# EAGLE board PiZeroAudioI2S (EAGLE 9.4.1)
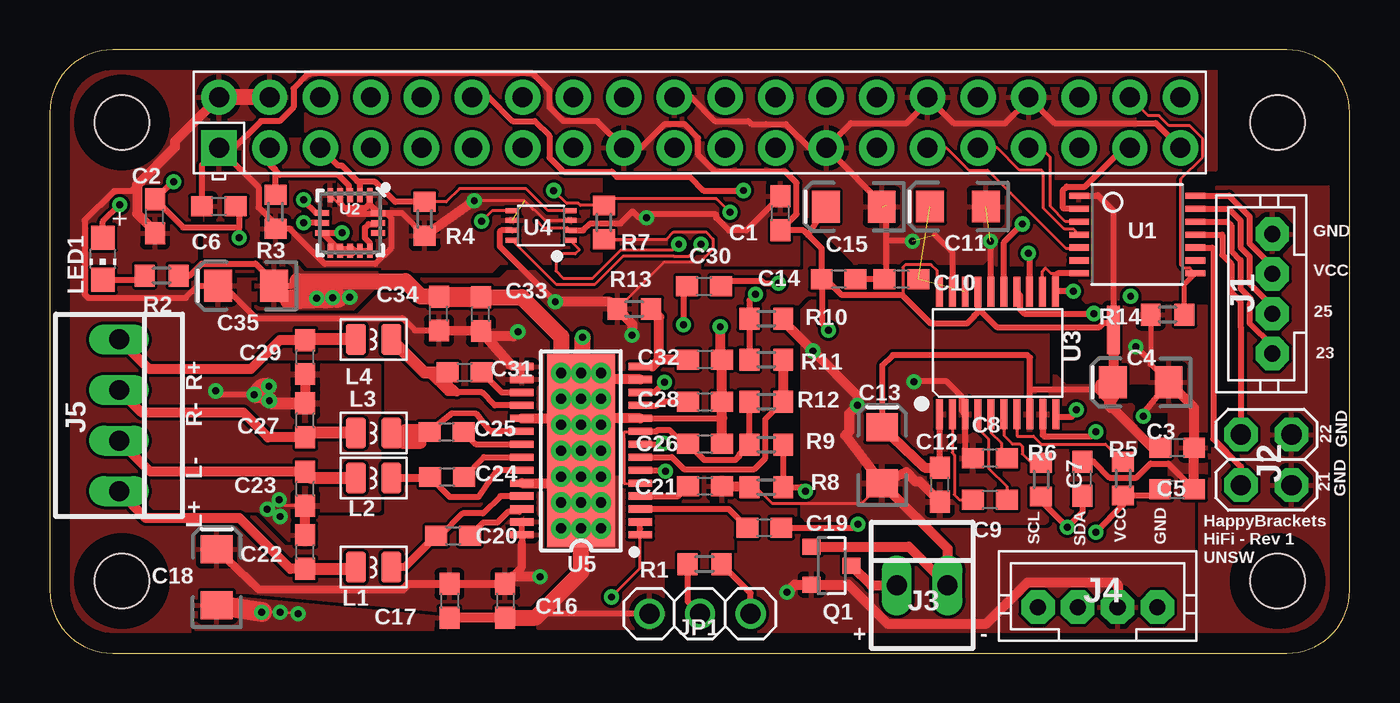
[diagram p0: board, top side]
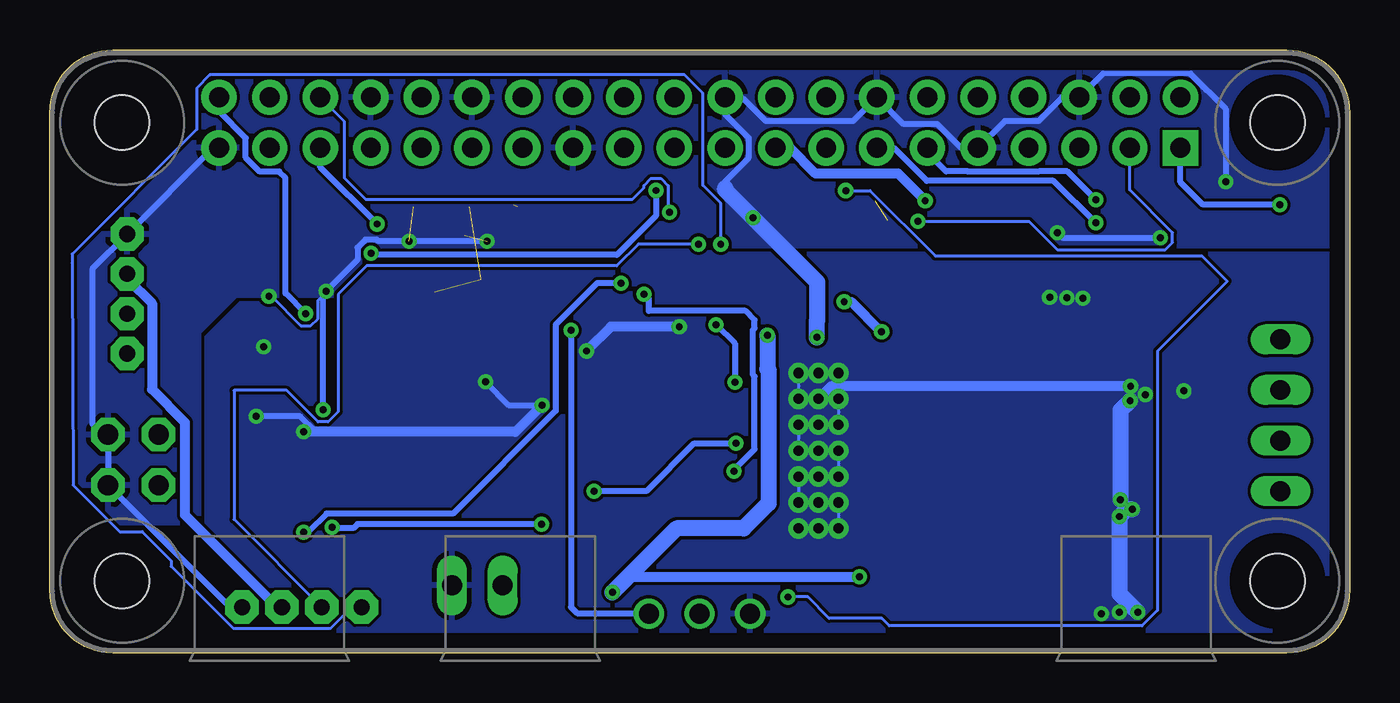
[diagram p1: board, bottom side, seen from below]

Size 65.25 x 30.28 mm. Coordinates in mm from the lower left corner, seen from the top.
Outline: 0,3.86 0,3.15 arc90 3.15,0 61.39,0 62.1,0 arc90 65.25,3.15 65.25,27.13 arc90 62.1,30.28 3.15,30.28 arc90 0,27.13 0,26.42 0,3.86
Copper layers (1*16): Top 0.035mm / dielectric 1.5mm / Bottom 0.035mm
Design rules "default": minimum track width 6mil, minimum drill 0.35mm, track to track 6mil, track to pad 6mil, pad to pad 6mil, via to via 6mil, smd to smd 6mil, copper to edge 40mil, drill to drill 6mil, minimum pad ring 10mil, minimum via ring 8mil, stop-mask expansion 4mil, vias tented up to drill 0mil, thermal gap 10mil
Net classes: 0 default: width 0.152 mm, clearance 0.152 mm; 2 PWM-LEFT: width 0.305 mm, drill 0.508 mm, clearance 0.508 mm; 3 PWM-RIGHT: width 0.305 mm, drill 0.508 mm, clearance 0.508 mm; 4 AUDIO-L: width 0.305 mm, drill 0.508 mm, clearance 0.508 mm; 5 AUDIO-R: width 0.305 mm, drill 0.508 mm, clearance 0.508 mm; 6 +5V: width 0.508 mm, drill 0.508 mm, clearance 0.254 mm

## Footprints (pad centres in the part's own frame; a part is rotated, then mirrored left to right if it is on the bottom)
C0603 = smd 1.1 x 1: 1 -0.85,0; 2 0.85,0
EIA3216 = smd 1.4 x 1.6: + 1.4,0; - -1.4,0
RASPBERRYPI_BASTELSTUBE_V13_RASPI_BOARD_B+_FULL = drill 1 pad 1.778 square: 1 8.37,25.23 | drill 1 pad 1.778: 2 8.37,27.77; 3 10.91,25.23; 4 10.91,27.77; 5 13.45,25.23; 6 13.45,27.77; 7 15.99,25.23; 8 15.99,27.77; 9 18.53,25.23; 10 18.53,27.77; 11 21.07,25.23; 12 21.07,27.77; 13 23.61,25.23; 14 23.61,27.77; 15 26.15,25.23; 16 26.15,27.77; 17 28.69,25.23; 18 28.69,27.77; 19 31.23,25.23; 20 31.23,27.77; 21 33.77,25.23; 22 33.77,27.77; 23 36.31,25.23; 24 36.31,27.77; 25 38.85,25.23; 26 38.85,27.77; 27 41.39,25.23; 28 41.39,27.77; 29 43.93,25.23; 30 43.93,27.77; 31 46.47,25.23; 32 46.47,27.77; 33 49.01,25.23; 34 49.01,27.77; 35 51.55,25.23; 36 51.55,27.77; 37 54.09,25.23; 38 54.09,27.77; 39 56.63,25.23; 40 56.63,27.77 | hole 2.75: 3.5,3.5; 3.5,26.5; 61.5,3.5; 61.5,26.5
JST-PH4 = drill 0.813 pad 1.676 octagon: 1 -3,0; 2 -1,0; 3 1,0; 4 3,0
2X2 = drill 1.016 pad 1.676 octagon: 1 -3.81,-1.27; 2 -3.81,1.27; 3 -1.27,-1.27; 4 -1.27,1.27
22-23-2021 = drill 1 long: 1 -1.27,0; 2 1.27,0
22-23-2041 = drill 1 long: 1 -3.81,0; 2 -1.27,0; 3 1.27,0; 4 3.81,0
1X03 = drill 1.016: 1 -2.54,0; 2 0,0; 3 2.54,0
L0806 = smd 1.016 x 1.524: 1 -0.889,0; 2 0.889,0
CHIP-LED0805 = smd 1.2 x 1.2: A 0,-1.05; C 0,1.05
SOT23 = smd 0.8 x 0.9: D 0,1; G -0.95,-1; S 0.95,-1
R0603 = smd 1 x 1.1: 1 -0.85,0; 2 0.85,0
SHORT = smd 1.27 x 0.635: AN -0.635,0; DIG 0.508,0
TSSOP14 = smd 0.305 x 0.991: 1 -1.95,-2.918; 2 -1.3,-2.918; 3 -0.65,-2.918; 4 0,-2.918; 5 0.65,-2.918; 6 1.3,-2.918; 7 1.95,-2.918; 8 1.95,2.918; 9 1.3,2.918; 10 0.65,2.918; 11 0,2.918; 12 -0.65,2.918; 13 -1.3,2.918; 14 -1.95,2.918
LGA-16-3X3 = smd 0.7 x 0.28: 1 -1.4,1; 2 -1.4,0.5; 3 -1.4,0; 4 -1.4,-0.5; 5 -1.4,-1; 9 1.4,-1; 10 1.4,-0.5; 11 1.4,0; 12 1.4,0.5; 13 1.4,1 | smd 0.28 x 0.7: 6 -0.5,-1.4; 7 0,-1.4; 8 0.5,-1.4; 14 0.5,1.4; 15 0,1.4; 16 -0.5,1.4
TSSOP20-0.65-6.5X4.4MM = smd 0.35 x 1.5: 1 -2.925,-3.065; 2 -2.275,-3.065; 3 -1.625,-3.065; 4 -0.975,-3.065; 5 -0.325,-3.065; 6 0.325,-3.065; 7 0.975,-3.065; 8 1.625,-3.065; 9 2.275,-3.065; 10 2.925,-3.065; 11 2.91,3.065; 12 2.26,3.065; 13 1.61,3.065; 14 0.96,3.065; 15 0.325,3.065; 16 -0.325,3.065; 17 -0.975,3.065; 18 -1.625,3.065; 19 -2.275,3.065; 20 -2.925,3.065
VFSOP-8 = smd 0.25 x 0.65: P$1 -0.75,-1.45; P$2 -0.25,-1.45; P$3 0.25,-1.45; P$4 0.75,-1.45; P$5 0.75,1.45; P$6 0.25,1.45; P$7 -0.25,1.45; P$8 -0.75,1.45
HTSSOP28 = smd 0.36 x 1.19: 1 -4.225,-2.97; 2 -3.575,-2.97; 3 -2.925,-2.97; 4 -2.275,-2.97; 5 -1.625,-2.97; 6 -0.975,-2.97; 7 -0.325,-2.97; 8 0.325,-2.97; 9 0.975,-2.97; 10 1.625,-2.97; 11 2.275,-2.97; 12 2.925,-2.97; 13 3.575,-2.97; 14 4.225,-2.97; 15 4.225,2.97; 16 3.575,2.97; 17 2.925,2.97; 18 2.275,2.97; 19 1.625,2.97; 20 0.975,2.97; 21 0.325,2.97; 22 -0.325,2.97; 23 -0.975,2.97; 24 -1.625,2.97; 25 -2.275,2.97; 26 -2.925,2.97; 27 -3.575,2.97; 28 -4.225,2.97 | drill 0.508: GND@10 -3.9,1; GND@11 -3.9,0; GND@12 -3.9,-1; GND@13 -2.6,-1; GND@14 -2.6,0; GND@15 -2.6,1; GND@16 -1.3,1; GND@17 -1.3,0; GND@18 -1.3,-1; GND@19 0,-1; GND@20 0,0; GND@21 0,1; GND@22 1.3,1; GND@23 1.3,0; GND@24 1.3,-1; GND@25 2.6,-1; GND@26 2.6,0; GND@27 2.6,1; GND@28 3.9,1; GND@29 3.9,0; GND@30 3.9,-1 | smd 9.7 x 3.4: GND@PAD 0,0

## Placement (x,y rotation side)
C1  0.1uF  [C0603]  36.68,22.07 90 top
C2  0.1uF  [C0603]  5.28,21.92 90 top
C3  0.1uF  [C0603]  56.59,10.31 180 top
C4  10uF  [EIA3216]  54.76,13.59 180 top
C5  2.2nF  [C0603]  56.58,8.22 0 top
C6  0.1uF  [C0603]  8.49,22.43 0 top
C7  2.2nF  [C0603]  51.83,8.76 90 top
C8  2.2uF  [C0603]  47.19,9.78 180 top
C9  2.2uF  [C0603]  47.19,7.7 180 top
C10  0.1uF  [C0603]  42.75,18.77 180 top
C11  10uF  [EIA3216]  45.58,22.41 180 top
C12  0.1uF  [C0603]  44.68,8.46 90 top
C13  10uF  [EIA3216]  41.78,9.93 90 top
C14  0.1uF  [C0603]  39.6,18.77 180 top
C15  10uF  [EIA3216]  40.36,22.4 180 top
C16  1nF  [C0603]  22.86,2.63 270 top
C17  0.1uF  [C0603]  20.07,2.63 270 top
C18  100uF  [EIA3216]  8.38,3.81 90 top
C19  1uF  [C0603]  35.86,6.3 0 top
C20  220nF  [C0603]  20.24,5.89 0 top
C21  1uF  [C0603]  32.89,8.38 0 top
C22  1nF  [C0603]  12.83,5.08 90 top
C23  1nF  [C0603]  12.83,8.26 90 top
C24  220nF  [C0603]  19.94,8.84 0 top
C25  220nF  [C0603]  19.91,11.1 0 top
C26  1uF  [C0603]  32.89,10.5 0 top
C27  1nF  [C0603]  12.83,11.68 90 top
C28  1uF  [C0603]  32.89,12.62 0 top
C29  1nF  [C0603]  12.83,14.86 90 top
C30  1uF  [C0603]  32.84,18.41 0 top
C31  220nF  [C0603]  20.83,14.1 0 top
C32  1uF  [C0603]  32.89,14.73 0 top
C33  1nF  [C0603]  21.64,17.02 90 top
C34  0.1uF  [C0603]  19.53,17.04 90 top
C35  100uF  [EIA3216]  9.86,18.44 180 top
CON1  RPI-Header  [RASPBERRYPI_BASTELSTUBE_V13_RASPI_BOARD_B+_FULL]  0.13,0.13 0 top
J1  GROVE  [JST-PH4]  61.37,18.03 90 top
J2  2X2HEADER  [2X2]  61.06,7.16 270 top
J3  2X1-LOCKING  [22-23-2021]  43.79,3.4 0 top
J4  GROVE  [JST-PH4]  52.6,2.31 0 top
J5  4X1-LOCKING  [22-23-2041]  3.48,11.94 270 top
JP1  Header 1x3  [1X03]  32.64,1.98 180 top
L1  FB  [L0806]  16.26,4.32 180 top
L2  FB  [L0806]  16.26,8.79 180 top
L3  FB  [L0806]  16.26,11.05 180 top
L4  FB  [L0806]  16.26,15.75 180 top
LED1  RED  [CHIP-LED0805]  2.67,19.79 180 top
Q1  DMG2305UX  [SOT23]  39.24,4.39 270 top
R1  220  [R0603]  32.87,4.47 0 top
R2  220  [R0603]  5.61,18.95 180 top
R3  10K  [R0603]  11.33,22.15 90 top
R4  10K  [R0603]  18.82,21.79 90 top
R5  76K8  [R0603]  53.87,8.76 270 top
R6  76K8  [R0603]  49.76,8.71 270 top
R7  10K  [R0603]  27.81,21.62 90 top
R8  39K  [R0603]  35.97,8.33 180 top
R9  56K  [R0603]  35.97,10.46 0 top
R10  33K  [R0603]  35.97,16.79 0 top
R11  33K  [R0603]  35.97,14.73 180 top
R12  33K  [R0603]  35.97,12.62 0 top
R13  10R  [R0603]  29.34,17.27 180 top
R14  10K  [R0603]  56.11,16.99 0 top
SH1  SHORT  [SHORT]  53.39,16.28 90 top
SH2  SHORT  [SHORT]  26.62,13.97 90 top
U1  TXB0104PWR  [TSSOP14]  54.58,21.01 270 top
U2  LSM6DS33  [LGA-16-3X3]  15.07,21.59 270 top
U3  PCM5101A  [TSSOP20-0.65-6.5X4.4MM]  47.57,15.06 0 top
U4  TXS0102  [VFSOP-8]  24.66,21.46 90 top
U5  TPA3144D2PWPR  [HTSSOP28]  26.67,10.16 90 top

## Library data of the parts
C1-C3 C6 C10 C12 C14 C17 C19 C21 C26 C28 C30 C32 C34 = rcl; OC_FARNELL: unknown; SPICEPREFIX: C
C4 C11 C13 C15 = HappyBrackets; MF: AVX; MPN: F931C106MAA; OC_FARNELL: 2852673
C5 C7 = rcl; MF: WALSIN; MPN: 0603B222K500CT; OC_FARNELL: 2496845; SPICEPREFIX: C
C8 C9 = rcl; MF: KEMET; MPN: C0603C225K8PACTU; OC_FARNELL: 1108322; SPICEPREFIX: C
C16 C22 C23 C27 C29 C33 = rcl; MF: AVX; MPN: 06035C102KAT2A; OC_FARNELL: 499134; SPICEPREFIX: C
C18 C35 = HappyBrackets; MF: AVX; MPN: TLJA107M010R1400; OC_FARNELL: 2690441
C20 C24 C25 C31 = rcl; MF: TAIYO YUDEN; MPN: EMK107B7224KA-T; OC_FARNELL: 1683648; SPICEPREFIX: C
CON1 = RPI-Zero; OC_FARNELL: unknown
J1 J2 J4 L1-L4 SH1 SH2 U5 = HappyBrackets; OC_FARNELL: unknown
J3 = HappyBrackets; MF: MOLEX; MPN: 22-23-2021; OC_FARNELL: 1462926
J5 = HappyBrackets; MF: MOLEX; MPN: 22-23-2041; OC_FARNELL: 1462920
JP1 LED1 R1 R2 R13 U4 = adafruit; OC_FARNELL: unknown
Q1 = HappyBrackets; MF: DIODES INC.; MPN: DMG2305UX-7; OC_FARNELL: 2543533
R3 R4 R7 R14 = adafruit; MF: YAGEO; MPN: RC0603FR-0710KL; OC_FARNELL: 2133286
R5 R6 = adafruit; MF: PANASONIC ELECTRONIC COMPONENTS; MPN: RMCF0603FT76K8; OC_FARNELL: 2303120
R8 = adafruit; MF: YAGEO; MPN: RC0603FR-0739KL; OC_FARNELL: 9238670
R9 = adafruit; MF: VISHAY; MPN: CRCW060356K0FKEA.; OC_FARNELL: 2138473RL
R10-R12 = adafruit; MF: MULTICOMP; MPN: MCMR06X3302FTL; OC_FARNELL: 2073473
U1 = adafruit; MF: TEXAS INSTRUMENTS; MPN: TXB0104PWR; OC_FARNELL: 1607891
U2 = HappyBrackets; MF: STMICROELECTRONICS; MPN: LSM6DS33TR; OC_FARNELL: 2762756
U3 = HappyBrackets; MF: TEXAS INSTRUMENTS; MPN: PCM5101AQPWRQ1; OC_FARNELL: 2402250

## Nets
+3V3: C1.1 C6.1 C14.2 C15.+ CON1.1 CON1.17 JP1.1 LED1.A R1.2 R3.1 R4.1 SH1.DIG U1.1 U2.1 U2.4 U2.5 U2.16 U3.17 U3.20 U4.P$3 U4.P$6
+5V: C2.1 C16.1 C17.1 C18.+ C33.1 C34.1 C35.+ CON1.2 CON1.4 J1.3 J4.3 Q1.S R7.1 R13.2 U1.14 U4.P$7 U5.15 U5.16 U5.27 U5.28
+5V-IN: J3.1 Q1.D
/MUTE: CON1.36 R7.2 U5.1 U5.2
ACC-INT1: CON1.11 U2.6
ACC-INT2: CON1.13 U2.7
AGND: C3.1 C4.- C5.2 C7.2 C8.2 C12.1 C13.- C16.2 C17.2 C18.- C21.2 C22.2 C23.1 C26.2 C27.2 C28.2 C29.1 C32.2 C33.2 C34.2 C35.- J3.2 JP1.3 Q1.G R2.1 R8.2 R10.2 R14.1 SH2.AN U3.3 U3.9 U5.10 U5.13 U5.19 U5.24 U5.GND@10 U5.GND@11 U5.GND@12 U5.GND@13 U5.GND@14 U5.GND@15 U5.GND@16 U5.GND@17 U5.GND@18 U5.GND@19 U5.GND@20 U5.GND@21 U5.GND@22 U5.GND@23 U5.GND@24 U5.GND@25 U5.GND@26 U5.GND@27 U5.GND@28 U5.GND@29 U5.GND@30 U5.GND@PAD
AN3V3: C3.2 C4.+ C12.2 C13.+ SH1.AN U3.1 U3.8
AUDIO-LEFT: C7.1 C19.2 R6.2
AUDIO-RIGHT: C5.1 C30.2 R5.2
GND: C1.2 C2.2 C6.2 C10.2 C11.- C14.1 C15.- CON1.6 CON1.9 CON1.14 CON1.20 CON1.25 CON1.30 CON1.34 CON1.39 J1.4 J2.2 J2.4 J4.4 SH2.DIG U1.7 U2.8 U2.9 U2.10 U2.11 U2.12 U2.13 U2.15 U3.10 U3.11 U3.12 U3.16 U3.19 U4.P$2
GPI022-OUT: J2.1 U1.11
GPIO21: CON1.29 U1.5
GPIO21-OUT: J2.3 U1.10
GPIO22: CON1.31 U1.4
GPIO23: CON1.33 U1.3
GPIO23-OUT: J1.1 U1.12
GPIO25: CON1.37 U1.2
GPIO25-OUT: J1.2 U1.13
L+: C22.1 J5.4 L1.2
L-: C23.2 J5.3 L2.2
N$1: R5.1 U3.7
N$2: C8.1 U3.5
N$3: C9.1 U3.4
N$4: C9.2 U3.2
N$6: LED1.C R2.2
N$7: C21.1 U5.4
N$8: C28.1 U5.11
N$9: C32.1 R13.1 U5.14
N$10: C31.2 U5.17
N$11: R6.1 U3.6
N$12: C10.1 C11.+ U3.18
N$13: C25.2 U5.21
N$14: C19.1 U5.3
N$15: C30.1 U5.12
N$16: C24.2 U5.22
N$17: C20.2 U5.26
N$18: C20.1 L1.1 U5.25
N$19: C24.1 L2.1 U5.23
N$20: C25.1 L3.1 U5.20
N$21: C31.1 L4.1 U5.18
N$23: R10.1 R11.2 U5.6
N$24: R11.1 R12.2 U5.7
N$25: R8.1 R9.2 U5.8
N$26: C26.1 R9.1 R12.1 U5.5 U5.9
OE: CON1.38 R14.2 U1.8
PCM-CLK: CON1.12 U3.13
PCM_DOUT: CON1.40 U3.14
PCM_FS: CON1.35 U3.15
PWR-LED: JP1.2 R1.1
R+: C29.2 J5.1 L4.2
R-: C27.1 J5.2 L3.2
SCL: CON1.5 R4.2 U2.2 U4.P$4
SCL-OUT: J4.1 U4.P$1
SDA: CON1.3 R3.2 U2.3 U4.P$5
SDA-OUT: J4.2 U4.P$8

## Tracks (layer width: path | path; a pad name or v marks a point on that pad's centre or on a via)
+3V3  (via drill 0.35)  (1 unrouted)
  Top 0.152: U2.5 14.48,22.58 14.56,22.58 | U2.4 14.57,22.49 15.02,22.05 | v21.31,22.71 23.82,22.71 24.26,22.28 24.31,22.28 24.87,21.72 U4.P$3 | U3.20 44.55,18.23 44.55,19.19 44.24,19.5 42.95,19.5 42.82,19.37 42.82,17.98 42.81,17.97
  Top 0.305: 14.56,22.58 14.81,22.34 15.84,22.34 16.03,22.53 16.03,22.95 U2.1 16.07,22.49 U2.16 17.67,22.09 R4.1 | C6.1 7.64,24.5 CON1.1 8.63,25.22 | 8.63,25.22 10.47,23.38 10.47,22.37 11.33,21.52 R3.1 12.04,21.3 13.81,19.53 16.34,19.53 17.13,20.32 17.13,21.86 16.94,22.05 15.02,22.05 | 8.63,25.22 9.12,25.22 10.6,26.7 11.53,26.7 12.23,27.4 12.23,28.33 12.95,29.06 13.05,29.06 13.08,29.09 24.23,29.09 25.08,28.24 25.08,27.4 25.78,26.7 27.47,26.7 CON1.17 29.67,25.36 30.86,26.55 31.85,26.55 32.55,25.85 32.55,25.02 33.4,24.16 36.92,24.16 37.48,23.6 37.48,22.03 C1.1 37.82,21.22 38.06,20.99 | C14.2 38.75,20.3 38.06,20.99 | U3.17 46.6,17.3 | 46.6,17.3 46.6,17.16 46.61,17.15 46.41,16.94 46.41,16.91 46.04,16.53 44.24,16.53 42.81,17.97 39.77,17.97 38.97,18.77 C14.2 | U1.1 52.57,22.96 52.6,22.99 53.39,22.2 53.39,17.15 SH1.DIG 53.59,16.59 52.91,16.59 52.68,16.36 47.54,16.36 46.6,17.3 | C15.+ 38.06,20.99 | LED1.A 2.67,21.67 v3.51,22.5 | C14.2 38.75,16.55 v39.09,16.2 | JP1.1 35.18,3.01 R1.2
  Top 0.508: v21.31,22.71 R4.1
  Bottom 0.305: v3.51,22.5 7.37,22.5 8.5,23.63 CON1.1 | v39.09,16.2 39.09,2.31 38.79,2.01 35.2,2.01 JP1.1
  Bottom 0.508: v21.31,22.71 22.66,24.06 26.81,24.06 28.11,25.36 CON1.17
  pour Top (rank 4): 12.83,30.61 12.83,24.26 58.55,24.26 58.55,29.34 58.55,30.58 14.1,30.61 14.12,30.58
  pour Top (rank 2): 7.75,25.53 7.75,19.18 22.22,19.18 22.61,19.56 27.69,19.56 27.69,25.27 27.18,25.78 8,25.78
  pour Top (rank 2): 48.26,30.1 48.26,23.24 47.5,22.48 47.5,20.45 48.01,19.94 49.66,19.94 52.45,17.15 65.41,17.15 66.04,17.78 66.04,30.35 65.66,30.73 48.51,30.73 48.39,30.61
+5V  (via drill 0.35)
  Top 0.152: R7.1 30.95,20.77 31.32,21.14 32.94,21.14 33.3,20.78 33.3,20.28 32.64,19.62 30.83,19.62 R13.2
  Top 0.305: C35.+ 8.61,18.44 | 8.61,18.44 8.72,18.44 10.35,16.81 17.7,16.81 18.33,16.19 C34.1 | 23.16,14.45 23.23,14.38 U5.15 U5.16 | U5.27 U5.28 23.7,5.54 | U1.14 59.19,22.96 60.22,21.92 60.22,20.56 61.37,19.42 J1.3 | v25.37,17.63 22.58,20.42 22.58,21.14 22.66,21.21 U4.P$7 | 4.38,23.49 4.08,23.19 3.22,23.19 1.75,21.72 1.75,18.02 1.94,17.83 6.83,17.83 7.44,18.44 8.61,18.44
  Top 0.406: C18.+ 10.49,3.2 17.73,3.2 18,3.48 C17.1 C16.1 23.2,3.82 23.7,4.32 23.7,5.54
  Top 0.508: C34.1 C33.1 21.88,15.9 | 21.88,15.9 23.16,14.45 | v25.37,17.63 28.13,17.63 R13.2 29.24,16.52 v29.24,15.95 | v23.5,16.13 23.26,15.9 21.88,15.9 | v24.61,3.84 23.22,3.84 23.2,3.82 | CON1.2 6.27,25.67 6.27,25.38 4.38,23.49 4.38,22.05 5.28,21.15 C2.1 | v37.01,3.05 37.4,3.44 Q1.S 40.08,3.44 42.04,1.49 47.02,1.49 49.09,3.56 53.48,3.56 53.6,3.43 J4.3
  Top 0.813: CON1.4 CON1.2
  Bottom 0.508: v23.5,16.13 23.52,16.13 25.02,17.63 v25.37,17.63 | v24.61,3.84 36.22,3.84 v37.01,3.05 | J1.3 61.37,18.79 60.12,17.55 60.12,13.23 58.47,11.58 58.47,6.93 55.09,3.56 54.36,2.83 54.36,2.82 53.85,2.31 J4.3
  Bottom 0.813: v29.24,15.95 29.24,14.25 29.16,14.18 29.16,7.52 30.42,6.26 33.79,6.26 v37.01,3.05
  pour Top (rank 6): 2.29,18.8 22.61,18.8 22.99,19.18 48.39,19.18 49.66,19.18 52.2,16.64 56.52,16.64 57.53,15.62 57.53,-0.89 57.28,-1.14 0.13,-1.14 -1.14,0.13 -1.14,16.64 0.13,16.64
  pour Top (rank 2): 7.75,26.8 11.81,26.8 12.32,27.3 12.32,30.61 -1.14,30.61 -1.14,17.02 -0.64,16.51 7.11,16.51 7.37,16.76 7.37,26.67 7.24,26.8 7.49,26.8 7.62,26.67
  pour Top (rank 2): 28.07,19.18 28.07,23.49 28.24,23.67 36.02,23.67 36.32,23.37 36.45,23.24 36.45,22.35 39.5,19.3 39.5,18.92 28.32,18.92
+5V-IN
  Top 0.508: Q1.D 41.23,3.4 J3.1
/MUTE  (via drill 0.35)
  Top 0.152: v34.14,22.12 33.47,22.8 28.15,22.8 R7.2 26.63,22.46 26.53,22.57 25.95,22.57 v25.3,23.22 | v28.19,2.82 29.64,4.27 29.64,6.22
  Top 0.305: U5.1 29.64,6.02 29.64,6.22 U5.2
  Bottom 0.152: CON1.36 50.47,26.69 50.47,23.85 49.4,22.78 35.99,22.78 35.43,23.34 35.43,23.47 35.07,23.82 34.57,23.82 34.22,23.47 34.22,22.23 34.14,22.15 v34.14,22.12 | v25.3,23.22 24.07,23.22 20.8,19.94 7.42,19.94 6.15,18.67 9.65,15.16 9.65,2.15 10.43,1.37 23.11,1.37 23.49,1.75 26.14,1.75 27.2,2.82 v28.19,2.82
ACC-INT1  (via drill 0.35)
  Top 0.305: U2.6 13.37,22.09 12.78,22.68 12.78,22.73 v12.75,22.76
  Bottom 0.305: v12.75,22.76 14.17,24.18 15.61,24.18 15.62,24.16 19.15,24.16 19.17,24.18 20.27,24.18 21.2,25.11 CON1.11
ACC-INT2  (via drill 0.35)
  Top 0.305: U2.7 v12.75,21.59
  Bottom 0.305: CON1.13 22.89,25.36 21.23,23.71 14.87,23.71 v12.75,21.59
AGND  (via drill 0.35)
  Top 0.152: U5.GND@PAD U5.GND@14 | U5.GND@28 25.76,14.06 26.21,13.61 26.67,13.61 26.67,13.54 | SH2.AN U5.GND@25 | U5.GND@PAD U5.GND@24 | U5.GND@PAD U5.GND@22 | U5.GND@PAD 28.27,11.76 28.27,11.78 | 12.19,18.44 12.42,18.67 | C23.1 11.8,7.4 v11.51,7.7 11.4,7.7 v10.92,7.21 | v12.47,1.98 v11.56,2.06 v10.64,2.06 | C21.2 35.39,8.38 36.25,7.52 40.77,7.52 C13.-
  Top 0.254: R14.1 55.26,14.49 C4.-
  Top 0.305: U5.GND@PAD U5.GND@10 | U5.GND@PAD U5.GND@11 | v13.39,17.8 13.82,17.8 | v14.2,17.83 14.44,17.83 | U5.GND@PAD 26.67,13.54 | C35.- 11.43,18.44 | 11.43,18.44 12.19,18.44 | U5.10 33.72,11.78 33.74,11.81 | C8.2 45.95,10.17 U3.3 45.78,12.17 45.78,12.87 45.01,13.64 43.41,13.64 v43.38,13.61 | U3.9 49.85,10.96 49.91,10.9 52.3,10.9 v52.5,11.1 | C4.- 54.89,12.03 v54.89,11.89 | JP1.3 24.59,1.98 24.39,1.78 | R2.1 7.03,18.95 7.63,19.55 10.33,19.55 11.43,18.44 | 57.46,8.19 56.14,9.51 55.25,9.51 54.55,8.81 53.2,8.81 52.4,9.61 C7.2 | v10.26,12.98 8.51,12.98 v8.33,13.16 | v54.51,15.37 55.26,14.62 55.26,14.49
  Top 0.406: v15.06,17.86 15.06,17.83 14.44,17.83
  Top 0.508: 12.06,17.73 arc-90 C35.- | 21.62,17.89 C33.2 | C16.2 C17.2 | C22.2 C23.1 | C29.1 C27.2 | U5.10 28.27,11.78 | U5.13 28,13.74 U5.GND@30 | U5.24 25.35,8.53 U5.GND@16 | U5.19 25.35,11.78 U5.GND@22 | C26.2 33.74,11.81 C28.2 C32.2 33.66,14.82 v33.66,16.38 | C21.2 35.07,8.38 R8.2 | C12.1 43.68,8.61 43.46,8.61 42.99,9.08 C13.- | C13.- 39.94,10.93 40.13,11.12 40.13,12.04 v40.54,12.45 40.54,12.93 v38.3,15.16 36.82,16.65 R10.2 | C13.- 45.06,5.26 J3.2 43.12,5.34 Q1.G | 57.46,8.19 C5.2 C3.1 57.44,12.31 C4.-
  Top 0.61: v11.02,12.67 11.16,12.53 C27.2
  Top 0.813: C33.2 23.69,17.87 25.67,15.88 25.67,14.89 25.65,14.88 25.65,14.08 U5.GND@28 | C16.2 24.39,1.78 26.67,4.06 U5.GND@11 | C34.2 18.63,17.89 17.86,18.67 12.42,18.67 | v11,13.39 10.67,13.39 v10.26,12.98 10.72,12.98 v11.02,12.67
  Top 1.016: 14.44,17.83 14.15,17.82 13.82,17.8 12.06,17.73 | C34.2 21.62,17.89 | v10.64,2.06 C18.-
  Bottom 0.152: U5.GND@28 U5.GND@29 U5.GND@30 U5.GND@25 U5.GND@26 U5.GND@27 U5.GND@22 U5.GND@23 U5.GND@24 U5.GND@19 U5.GND@PAD U5.GND@21 U5.GND@16 U5.GND@17 U5.GND@18 U5.GND@13 U5.GND@14 U5.GND@15 U5.GND@10 U5.GND@11 U5.GND@12
  Bottom 0.305: v54.89,11.89 52.68,11.89 51.89,11.1 v52.5,11.1 | v43.38,13.61 42.21,12.45 v40.54,12.45
  Bottom 0.508: v11,13.39 26.04,13.39 U5.GND@26 | v40.54,12.45 41.88,11.1 v52.5,11.1 | v33.66,16.38 37.08,16.38 v38.3,15.16
  Bottom 0.813: v11.02,12.67 11.51,12.19 v11.51,7.7 | v10.92,7.21 11.2,7.21 v11.56,6.86 11.56,2.97 v10.64,2.06
  pour Top: 10.34,19.51 10.34,17.3 10.36,17.27 15.27,17.27 15.52,17.53 16.31,18.31 16.43,18.31 16.43,19.1 13.13,19.1 12.78,19.1 12.37,19.51
  pour Top: 10.54,7.09 12.19,5.44 13.26,5.44 13.26,7.92 13.26,8.05 10.46,8.05 10.44,8.03 10.44,7.19
  pour Top: 19.87,1.79 9.55,2.77 7.32,2.74 7.32,1.19 19.91,1.19
  pour Top: 24.49,1.24 30.84,1.22 30.81,4.32 34.29,4.32 34.29,8.84 26.62,8.84 26.67,3.81 24.49,1.52
  pour Top: 53.77,17.4 53.77,13.56 53.82,13.56 55.22,13.56 55.22,12.14 56.18,12.14 56.18,8.59 57.58,8.59 57.96,8.59 58.09,8.59 58.09,17.4
  pour Top: 37.8,17.09 37.8,6.91 38.1,6.6 49.96,6.6 50.06,6.71 50.06,16.59 49.58,17.07 49.07,17.58 48.72,17.58 38.2,17.58 37.8,17.17 37.8,17.15 37.8,17.12
  pour Top: 4.9,14.38 4.9,7.67 5.36,7.21 16.46,7.21 16.51,7.26 16.51,14.38
  pour Bottom (rank 6): -1.88,20.22 -1.88,0.48 -0.05,-1.35 58.75,-1.35 59.03,-1.07 59.03,18.16 56.95,20.24 -1.88,20.24
AN3V3
  Top 0.305: U3.1 44.65,9.33 44.63,9.31 | U3.8 49.2,13.23 | 49.2,13.23 | 49.2,13.23 52.53,13.23 | 52.53,13.23 53.17,12.58 | 52.53,13.23 52.66,13.59 C4.+ | 49.2,13.23 49.2,14.83 49.07,14.96 42.32,14.96 41.78,14.43 C13.+
  Top 0.508: C13.+ 43.91,9.31 44.63,9.31 C12.2 | SH1.AN 53.39,12.8 53.17,12.58 | C4.+ 53.26,12.31 53.34,12.31 55.33,10.31 C3.2
  pour Top (rank 2): 41.86,14.66 41.86,9.91 54.36,9.91 54.46,10.01 54.46,12.22 53.34,13.33 50.98,13.33 49.2,15.11 49.05,14.96 42.27,14.96 41.96,14.66
AUDIO-LEFT  (via drill 0.35)
  Top 0.305: R6.2 49.76,7.65 v51.08,6.33 51.83,7.07 C7.1 | C19.2 40.38,6.3 v40.56,6.48
  Bottom 0.305: v51.08,6.33 51.03,6.27 50.01,6.27 49.81,6.48 v40.56,6.48
AUDIO-RIGHT  (via drill 0.35)
  Top 0.305: C5.1 55.43,7.91 R5.2 53.87,7.44 v52.5,6.07 | v36.58,18.57 35.84,18.57 35.72,18.69 33.97,18.69 C30.2
  Bottom 0.305: v52.5,6.07 52.48,6.1 52.27,6.1 51.36,7.01 45.01,7.01 39.86,12.16 39.86,16.48 37.77,18.57 v36.58,18.57
GND  (via drill 0.35)  (3 unrouted)
  Top 0.152: U3.12 49.83,19.18 49.99,19.33 50.26,19.06 50.6,19.06 | U4.P$2 25.97,21.36 24.79,21.36 24.44,21.71
  Top 0.305: U2.13 15.19,20.19 U2.11 | U2.15 16.42,21.53 16,21.53 15.82,21.36 15.82,20.82 16.07,20.57 U2.13 | 9.53,21.36 6.69,21.36 C2.2 6.16,23.65 v6.22,23.65 | 9.53,21.36 9.53,22.24 C6.2 | U2.9 U2.10 U2.8 14.6,21.09 14.61,21.08 14.66,21.08 v14.68,21.11 | U2.12 U2.13 | v9.5,20.85 9.5,21.34 9.53,21.36 | C1.2 34.97,21.21 34.08,21.21 33.46,21.84 33.46,21.99 33.43,22.02 30.12,22.02 v29.96,21.86 29.58,21.86 29.26,22.17 28.66,21.57 28.49,21.57 27.14,21.57 26.78,21.21 U4.P$2 | U1.7 50.6,19.06 50.47,18.92 50.48,18.91 U3.11 50.52,18.16 v51.38,18.16 | 41.97,22.48 41.97,22.36 | C14.1 C10.2 41.97,18.84 41.97,20.68 | U3.10 50.63,11.86 51.28,11.86 51.54,12.12 v51.54,12.22 | 39.08,25.26 CON1.25 40.21,26.59 43,26.59 44.06,27.65 CON1.30 45.36,26.59 47.98,26.59 49.14,27.75 CON1.34 50.44,26.59 55.52,26.59 CON1.39 | 39.08,25.26 41.97,22.36 | CON1.20 32.21,27.9 33.4,26.7 35.07,26.7 35.23,26.54 35.93,26.54 35.94,26.55 36.93,26.55 38.22,25.26 39.08,25.26 | 41.97,22.36 41.97,20.68 | 41.97,20.68 42.02,20.73 43.25,20.73 v43.31,20.67 | U3.16 47.25,20.64 v47.22,20.67 | 44.44,20.98 45.3,20.12 U3.19
  Top 0.508: U2.10 15.19,20.19
  Top 0.813: v26.75,15.85 26.75,14.6 SH2.DIG
  Bottom 0.152: v54.25,17.91 54.12,17.91 52.65,16.44 52.15,16.44 51.79,16.79 51.79,17.7 51.38,18.11
  Bottom 0.254: 8,29.08 12.39,29.08
  Bottom 0.305: 31.36,23.34 31.36,23.67 30.16,24.86 30.16,25.85 31.36,27.05 31.36,27.81 | 31.36,27.81 CON1.20 | CON1.39 57.04,25.36 J1.4 63.12,19.28 63.12,11.51 62.59,10.97 J2.2 J2.4 56.21,2.31 J4.4 | 31.36,27.81 30.42,27.81 29.31,26.7 24.93,26.7 CON1.14 22.39,26.55 20.7,26.55 19.51,25.36 CON1.9 17.31,26.7 15.62,26.7 14.43,27.9 CON1.6 12.39,29.08 | v14.68,21.11 14.43,20.85 v9.5,20.85 | 8,29.08 6.22,27.31 v6.22,23.65 | v51.54,12.22 51.54,17.96 51.38,18.11 v51.38,18.16 49.81,19.74 49.81,20.35 49.41,20.75 48.84,20.75 48.76,20.67 v47.22,20.67 | v43.31,20.67 v47.22,20.67 | v47.22,20.67
  Bottom 0.813: v26.75,15.85 26.75,16.66 26.72,16.69 26.72,18.62 v29.96,21.86 31.36,23.25 31.36,23.34
  pour Bottom (rank 4): -1.63,30.61 -1.63,20.42 47.04,20.45 48.82,18.67 49.53,17.96 55.96,17.96 57.28,16.64 57.81,16.1 57.81,6.55 65.81,6.55 65.81,30.61
  pour Top: 47.47,19.89 47.47,19.48 51.79,19.48 51.79,23.85 44.02,23.85
  pour Top (rank 3): 57.71,15.8 57.71,0.69 64.85,0.69 64.85,23.37 58.55,23.37 58.55,16.64
  pour Top (rank 2): 36.96,22.99 40.39,19.56 46.86,19.56 47.12,19.81 47.12,22.61 47.12,22.99 46.35,23.75 37.72,23.75
  pour Top: 37.59,23.57 37.59,19.46 28.27,19.46 28.27,23.62 37.59,23.62 37.59,23.6
  pour Top: 31.22,28.19 31.22,23.83 31.37,23.83 54.48,23.83 54.48,24.1 54.48,27.97 54.48,28.32 54.36,28.32 31.22,28.32 31.22,28.22
  pour Top: 46.61,25.3 46.61,22.2 46.63,22.2 52.45,22.2 52.45,25.27 52.45,25.3
GPI022-OUT
  Top 0.305: U1.11 58.85,21.01 58.85,19.99 59.31,19.53 59.31,18.11 59.77,17.65 59.77,16.37 59.79,16.35 J2.1
GPIO21
  Top 0.152: CON1.29 45.02,25.36 46.13,24.24 47.08,24.24 51,20.32 51.63,20.32 U1.5
GPIO21-OUT
  Top 0.305: U1.10 58.33,20.36 58.39,20.3 58.39,10.75 59.79,9.36 J2.3
GPIO22
  Top 0.152: U1.4 51.4,21.27 50.94,21.27 49.89,22.33 49.89,24.13 49.78,24.24 48.67,24.24 47.56,25.36 CON1.31
GPIO23
  Top 0.152: U1.3 50.99,21.66 50.22,22.43 50.22,24.89 49.75,25.36 CON1.33
GPIO23-OUT
  Top 0.305: U1.12 59.12,21.66 59.31,21.46 59.31,20.18 59.77,19.73 59.77,18.31 60.27,17.8 60.27,17.56 60.22,17.51 60.22,16.56 61.37,15.42 J1.1
GPIO25
  Top 0.305: U1.2 50.9,22.31 50.87,22.34 50.87,23.23 51.05,23.41 51.96,23.41 53.91,25.36 CON1.37
GPIO25-OUT
  Top 0.305: J1.2 61.37,17.42 60.22,18.56 60.22,19.91 59.77,20.37 59.77,21.72 59.16,22.33 59.14,22.31 U1.13
L+
  Top 0.508: C22.1 12.08,4.23 9.53,6.78 4.83,6.78 J5.4
  Top 0.61: C22.1 15.28,4.23 L1.2
L-
  Top 0.508: C23.2 5.04,9.1 J5.3
  Top 0.61: L2.2 13.14,8.79 C23.2
N$1
  Top 0.152: U3.7 48.55,10.89 49.38,10.89 49.77,10.49 52.99,10.49 R5.1
N$2
  Top 0.152: U3.5 47.25,11.06 47.76,10.55 47.76,10.06 C8.1
N$3
  Top 0.152: U3.4 46.6,11.28 47.12,10.76 47.12,9.29 48.04,8.37 C9.1
N$4
  Top 0.152: U3.2 45.3,10.06 45.41,9.95 45.41,7.96 45.67,7.7 C9.2
N$6
  Top 0.305: LED1.C 4.55,18.74 R2.2
N$7
  Top 0.305: U5.4 31.55,7.88 C21.1
N$8
  Top 0.305: C28.1 30.65,12.62 30.43,12.4 29.68,12.4 U5.11
N$9
  Top 0.305: U5.14 30.23,14.38
  Top 0.508: C32.1 30.58,14.73 | 30.58,14.73 30.58,16.88 R13.1 | 30.23,14.38 30.58,14.73
N$10
  Top 0.305: C31.2 22.69,13.08 U5.17
N$11
  Top 0.152: U3.6 47.9,10.93 48.32,10.51 48.69,10.51 48.82,10.37 48.82,10.01 49.26,9.56 R6.1
N$12  (2 unrouted)
N$13
  Top 0.305: C25.2 21.38,10.49 U5.21
N$14
  Top 0.305: U5.3 34.08,7.24 C19.1
N$15  (via drill 0.35)
  Top 0.305: C30.1 31.8,18.22 v31.8,16.49 | v30.86,13.59 30.36,13.08 U5.12
  Bottom 0.305: v31.8,16.49 30.86,15.55 v30.86,13.59
N$16
  Top 0.305: C24.2 21.78,9.83 U5.22
N$17
  Top 0.305: U5.26 23.56,7.09 23,7.09 22.46,6.55 21.75,6.55 C20.2
N$18
  Top 0.305: U5.25 22.62,7.88 21.74,7.01 20.73,7.01 19.61,5.89 C20.1
  Top 0.406: C20.1 17.82,4.32 L1.1
N$19
  Top 0.305: U5.23 22.46,9.19 21.56,7.9 21.51,7.85 20.08,7.85 C24.1
  Top 0.406: C24.1 19.09,8.79 L2.1
N$20
  Top 0.305: U5.20 22.11,11.13 21.41,12.01 20.19,12.04 19.48,11.48 C25.1
  Top 0.508: L3.1 17.65,10.52 18.64,10.52 17.88,11.1
  Top 0.813: 17.88,11.1 C25.1
N$21
  Top 0.305: U5.18 22.34,12.44 21.69,13.08 20.42,13.08 20.4,13.11
  Top 0.406: 19,14.1 19.99,13.11 20.4,13.11 | 20.42,13.08 19.98,13.53 C31.1
  Top 0.61: L4.1 18.8,14.1 19,14.1 C31.1
N$23  (via drill 0.35)
  Top 0.305: R11.2 R10.1 35.12,17.69 v35.43,18.01 | U5.6 30.85,9.19 v30.91,9.12
  Bottom 0.305: v30.91,9.12 30.91,9.21 29.88,10.24 29.88,13.88 29.95,13.95 29.95,16.25 29.88,16.32 29.88,16.72 30.33,17.17 35.18,17.17 35.18,17.8 35.38,18.01 v35.43,18.01
N$24
  Top 0.305: U5.7 31.23,9.83 31.82,9.24 35.37,9.24 35.92,9.79 35.92,11.73 R12.2
  Top 0.508: R12.2 R11.1
N$25  (via drill 0.35)
  Top 0.305: R9.2 R8.1 37.72,8.33 v37.92,8.13 | U5.8 30.77,10.49 v30.81,10.53
  Bottom 0.305: v37.92,8.13 35.31,8.13 32.91,10.53 v30.81,10.53
N$26
  Top 0.152: U5.5 28.83,8.51 28.83,8.9 28.82,8.91 28.82,10.76 28.83,10.77 28.83,11.1 29.6,11.1 U5.9
  Top 0.305: R12.1 R9.1 34.6,9.95 34.6,9.87 34.42,9.69 32.85,9.69 C26.1 31.81,10.5 31.1,11.21 30.53,11.21 30.45,11.13 U5.9
OE
  Top 0.152: CON1.38 55.14,26.98 55.68,26.98 56.18,26.48 57.22,26.48 57.87,25.82 57.87,24.89 56.78,23.8 56.78,19.46 56.91,19.33 57.23,19.33 U1.8
  Top 0.254: R14.2 56.96,18.51 U1.8
PCM-CLK  (via drill 0.35)
  Top 0.305: CON1.12 22.05,27.9 23.24,26.7 24.34,26.7 25.08,25.96 25.08,24.86 25.78,24.16 28.21,24.16 28.47,23.9 32.13,23.9 32.82,23.22 v34.82,23.22 | U3.13 49.18,19.88 49.12,19.94 v49.12,20.07
  Bottom 0.305: v34.82,23.22 34.82,21.95 36.78,19.99 49.05,19.99 v49.12,20.07
PCM_DOUT  (via drill 0.35)
  Top 0.305: U3.14 48.7,17.96 48.7,17.25 48.91,17.04 v52.4,17.04
  Bottom 0.305: v52.4,17.04 53.42,18.06 53.42,23.85 53.73,24.16 54.71,24.16 55.41,24.86 55.41,25.84 56.76,27.19 CON1.40
PCM_FS  (via drill 0.35)
  Top 0.305: U3.15 47.9,20.62 v48.82,21.54
  Bottom 0.305: v48.82,21.54 51.68,24.39 CON1.35
PWR-LED
  Top 0.305: R1.1 32.02,2.6 JP1.2
R+
  Top 0.508: C29.2 11.54,15.71 10.08,14.25 4.98,14.25 J5.1
  Top 0.61: L4.2 12.87,15.75 C29.2
R-
  Top 0.508: C27.1 10.96,10.83 9.73,12.06 4.62,12.06 J5.2
  Top 0.61: L3.2 13.04,11.05 C27.1
SCL
  Top 0.152: U4.P$4 25,22.21 23.9,23.32 20.57,23.32 19.89,22.64 R4.2
  Top 0.305: CON1.5 14.47,24.46 14.67,24.46 15.43,23.71 | 15.43,23.71 15.57,23.56 U2.2 | 15.43,23.71 15.49,23.64 16.34,23.64 17.34,22.64 R4.2
SCL-OUT  (via drill 0.35)
  Top 0.152: U4.P$1 26.58,20.24 26.38,20.04 25.76,20.04 25.4,19.68 25.4,19.18 25.76,18.82 27.25,18.82 28.66,20.24 31.27,20.24 31.55,20.53 v31.57,20.53
  Bottom 0.152: v31.57,20.53 31.57,22.57 32.47,23.47 32.47,28.11 33.38,29.02 57.22,29.02 57.87,28.36 57.87,26.28 64.13,20.03 64.13,19.58 64.09,8.44 61.75,6.09 60.61,6.09 59.16,4.65 59.16,4.36 56.05,1.24 51.16,1.24 50.09,2.31 J4.1
SDA  (via drill 0.35)
  Top 0.152: U4.P$5 22.21,22.21 v21.67,21.67
  Top 0.305: U2.3 15.02,23.05 15.02,23.47 14.48,24 11.56,24 11.19,24.37 11.04,24.52 11.04,24.56 | 11.04,24.56 CON1.3 | R3.2 11.33,24.27 11.04,24.56
  Bottom 0.152: v21.67,21.67 16.1,21.67 14.68,20.25 9.25,20.25 8.89,20.6 8.89,21.1 11.04,23.25 CON1.3
SDA-OUT  (via drill 0.35)
  Top 0.152: U4.P$8 25.41,18.52 27.37,18.52 28.79,19.94 31.31,19.94 31.32,19.92 32.08,19.92 v32.69,20.53
  Bottom 0.152: v32.69,20.53 35.7,20.53 36.8,19.43 49.35,19.43 50.78,18.01 50.78,12.12 51.29,11.61 51.79,11.61 53.36,13.18 56.01,13.18 56.01,6.72 J4.2

## Text on the board
tNames: GND | VCC | 25 | 23 | R+ | R- | L- | 22 | GND | 21 | GND | L+ | SCL | SDA | VCC | GND | HappyBrackets / HiFi - Rev 1 / UNSW | + | -